# Altium PCB LED.PcbDoc
Units mm, origin at the board's own origin, x right, y up, seen from the top; angles counter-clockwise.
Board outline 20 x 20 mm, 2 copper layers (Top Layer, Bottom Layer), stack 1.671 mm thick; 5 components, 4 nets, 10 pads, 1 vias.
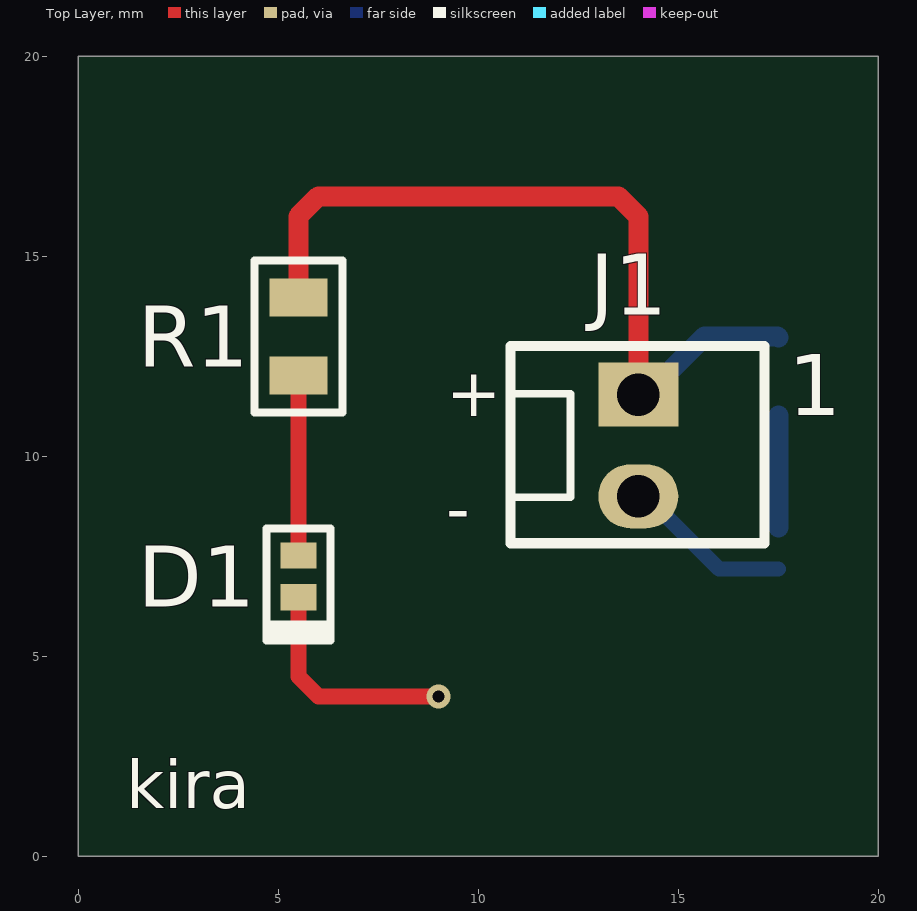
[diagram p0: Top Layer view]
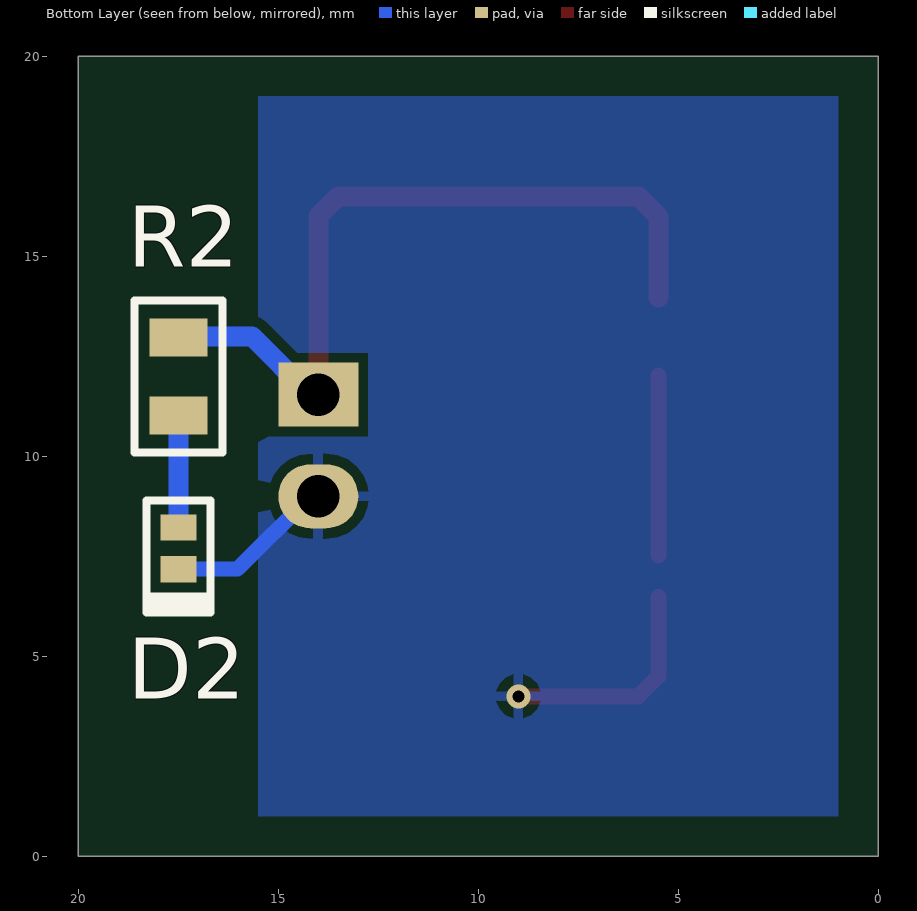
[diagram p1: Bottom Layer view, seen from below]
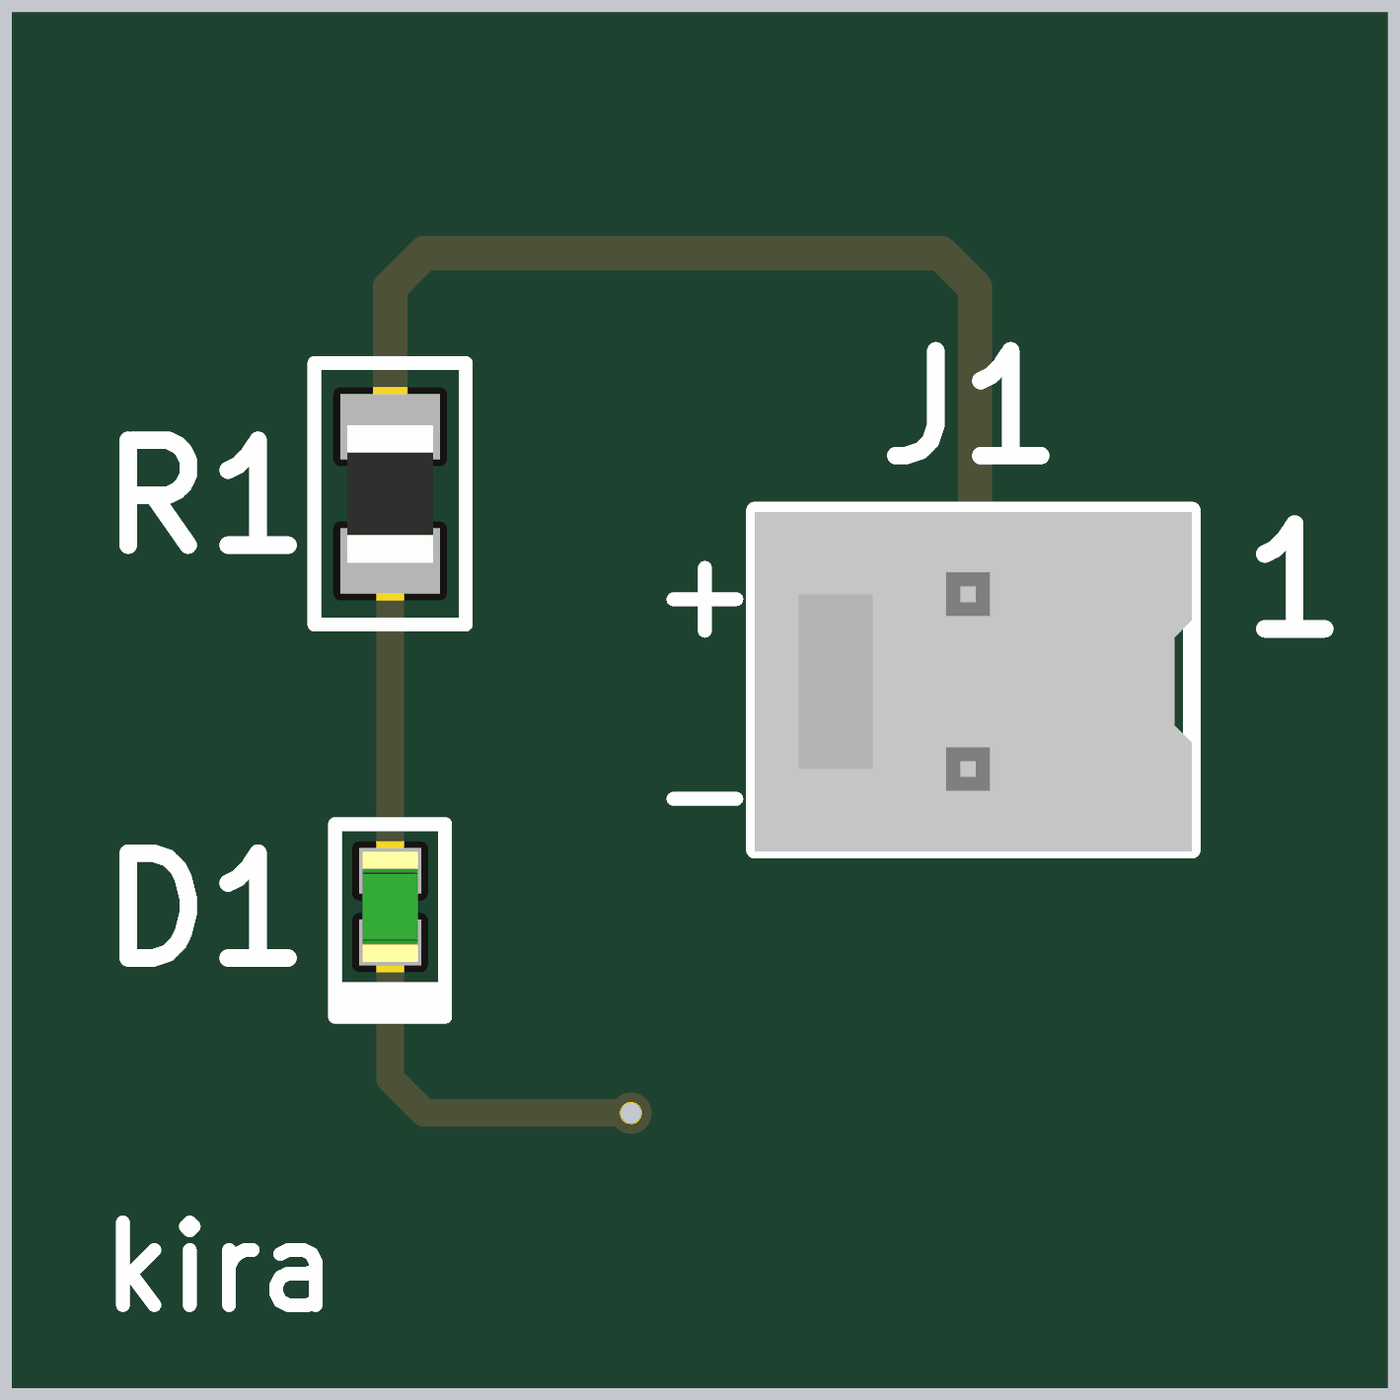
[diagram p2: 3D render of the assembled board from above, using the file's embedded part models]

## Layer stack, top to bottom
Top Solder: solder mask 0.0102, Solder Resist, Dk 3.5
Top Layer: signal copper 0.0356
Dielectric 1: dielectric 1.6, FR-4, Dk 4.8
Bottom Layer: signal copper 0.0356
Bottom Solder: solder mask 0.0102, Solder Resist, Dk 3.5

## Board outline
0,20 20,20 20,0 0,0

## Design rules (kind name [scope] priority, off if disabled: settings)
Clearance Clearance_1 [All] p1: gap=0.254 ignorepadtopadclearanceinfootprint=FALSE
Clearance [All] p2: gap=0.3 ignorepadtopadclearanceinfootprint=FALSE
MinimumSolderMaskSliver [All] p1: minsoldermaskwidth=0.1
PolygonConnect [All] p1: connectstyle=Relief reliefconductorwidth=0.254 reliefentries=4 polygonreliefangle="90 Angle" airgapwidth=0.254
RoutingVias [All] p1: holewidth=0.3 width=0.6 viastyle="Through Hole" minholewidth=0.3 minwidth=0.6 maxholewidth=0.3 maxwidth=0.6
SilkToSolderMaskClearance [IsPad] p1: minsilkscreentomaskgap=0.1 clearancetoexposedcopper=TRUE
SolderMaskExpansion [All] p1: expansion=0.102 istentingtop=FALSE
SupplyNets "Schematic Supply Nets_1" [InNet('+3v3')] p1: voltage=0.000
SupplyNets "Schematic Supply Nets" [InNet('GND')] p2: voltage=0.000
Width [All] p1: maxlimit=1 minlimit=0.3 preferedwidth=0.5
28 further rules are at their usual default settings.

## Components (designator, comment, footprint, x,y, rotation, side; value= is the part's Value field where it differs from the comment)
D1 "Green" LED0603G 5.5,7 r90 top
D2 "Green" LED0603G 17.5,7.7 r90 bottom
J1 "1X2 Header" HEADER1X2 14,11.54 r0 top
R1 "360R" R0805 5.5,13 r90 top
R2 "360R" R0805 17.5,12 r90 bottom

## Footprints (in the part's own frame and the unit in brackets; to place one, negate y for a bottom-side part, rotate by r counter-clockwise, add the part's x,y. Pads: shape width x height; smd on the part's side, far side on the other; paste and mask are expansions set on the pad)
HEADER1X2 [mm]
  rect 2x1.6 hole 1.07: 1(0,0)
  oval 2x1.6 hole 1.07: 2(0,-2.54)
  silkscreen extent -3.2,-3.71 3.15,1.22, body extent -3.2,-3.73 3.15,1.19, height 10.68
LED0603G [mm]
  rect 0.66x0.9 smd: 1(-0.52,0) 2(0.52,0)
  silkscreen extent -1.6,-0.9 1.2,0.9, body extent -0.8,-0.4 0.8,0.4, height 0.4
R0805 [mm]
  rect 0.95x1.45 smd: 1(-0.975,0) 2(0.975,0)
  silkscreen extent -1.9,-1.1 1.9,1.1, body extent -1,-0.63 1,0.63, height 0.61

## Part data
D1 D2: library part LNJ337W83RA, Manufacturer=Panasonic, Name="Green 0603 LED", Part No=LNJ337W83RA
J1: library part 22232021, Manufacturer=Molex, Name="Header 1X2", Part No=22232021, Series No=6373
R1 R2: library part "CRCW-HP e3", Manufacturer=Vishay, Name=resistor, Part No="CRCW-HP e3"

## Via types
v1: diameter 0.6, hole 0.3, Top Layer to Bottom Layer, tented both sides, 1 vias

## Nets (pads, with @x,y where several pads share a name; then routed paths per layer and width w, separated by ;. In a path a pad name is that pad's centre, name@x,y a point inside that pad or via, vN(x,y) a via of type N, cw(c..) or ccw(c..) an arc to the next point about the centre after c; other vN are vias at no path point)
+3v3: J1.1 R1.2 R2.2 | length 19.5
  Top Layer w0.5: R1.2 5.5,16 6,16.5 13.5,16.5 14,16 J1.1
  Bottom Layer w0.5: J1.1 14.2,11.54 15.66,13 17.475,13 R2.2
diode1: D1.2 R1.1 | length 4.5
  Top Layer w0.4: D1.2 R1.1
diode2: D2.2 R2.1 | length 2.8
  Bottom Layer w0.5: D2.2 R2.1
GND: D1.1 D2.1 J1.2 | length 9.9
  Top Layer w0.4: D1.1 5.5,4.5 6,4 v1(9,4)
  Bottom Layer w0.381: J1.2 14.2,9 16.02,7.18 D2.1

## Polygon pours and split planes (outlines as drawn)
GND on Bottom Layer "GND_L02_P000" (solid, remove dead copper, pour order 0): 1,19 15.5,19 15.5,1 1,1

## Silkscreen, mask and mechanical layers (free items; w line width, h text height)
Top Overlay:
  text "+" at 9.2,11 h1.2
  text "-" at 9.2,8.1 h1.2
  text "kira" at 1.2,1.2 h1.2
Board outline:
  the board outline again, w0.1

## Text inside footprints (layer, text, board x,y; h text height)
J1: Top Overlay "1" at 17.754,11.024 h1.52